# Altium PCB I2C_PCB.PcbDoc
Units mm, origin at the board's own origin, x right, y up, seen from the top; angles counter-clockwise.
Board outline 28.96 x 15.49 mm, 2 copper layers (Top Layer, Bottom Layer); 12 components, 8 nets, 32 pads, 4 vias.
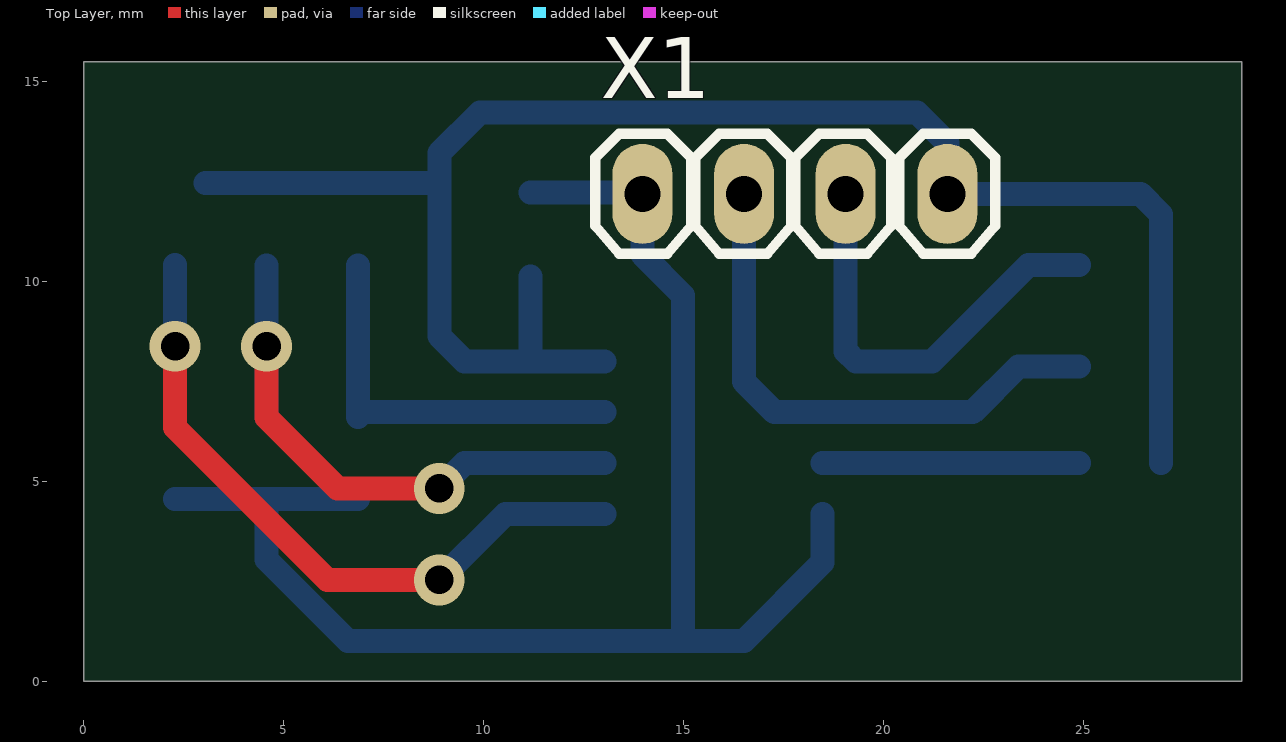
[diagram p0: Top Layer view]
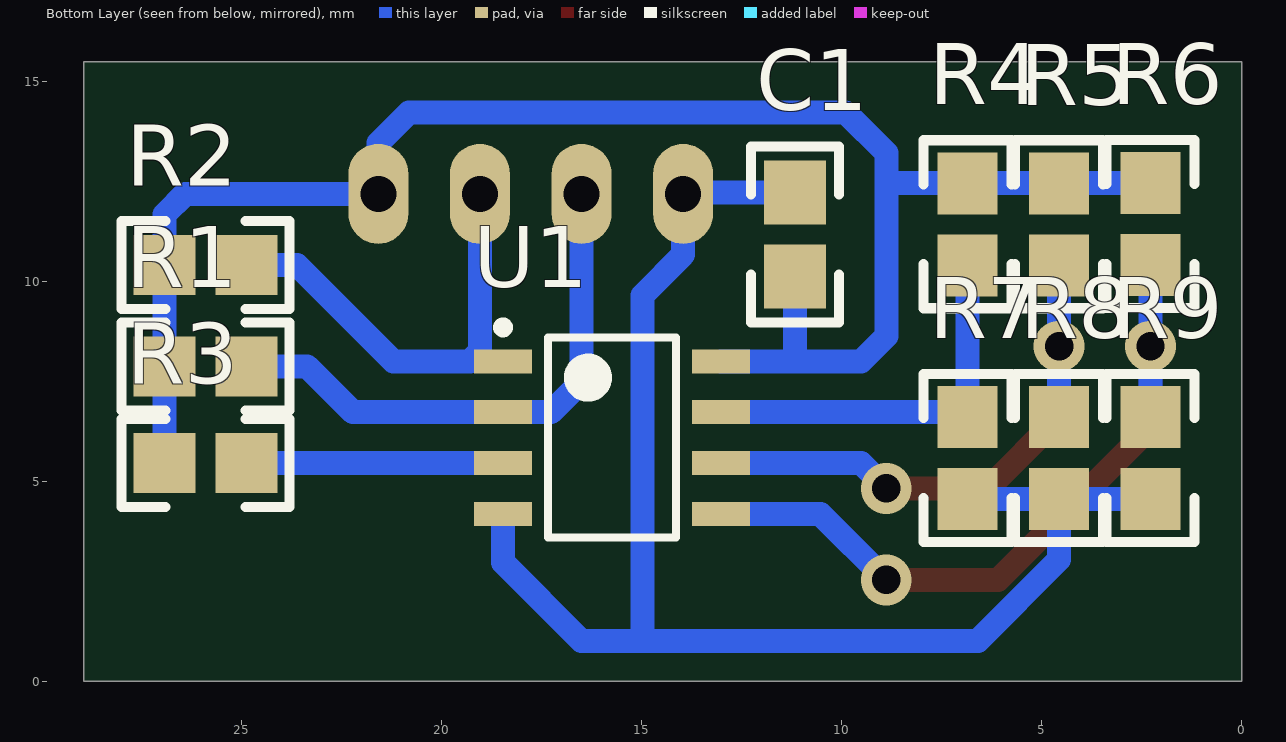
[diagram p1: Bottom Layer view, seen from below]
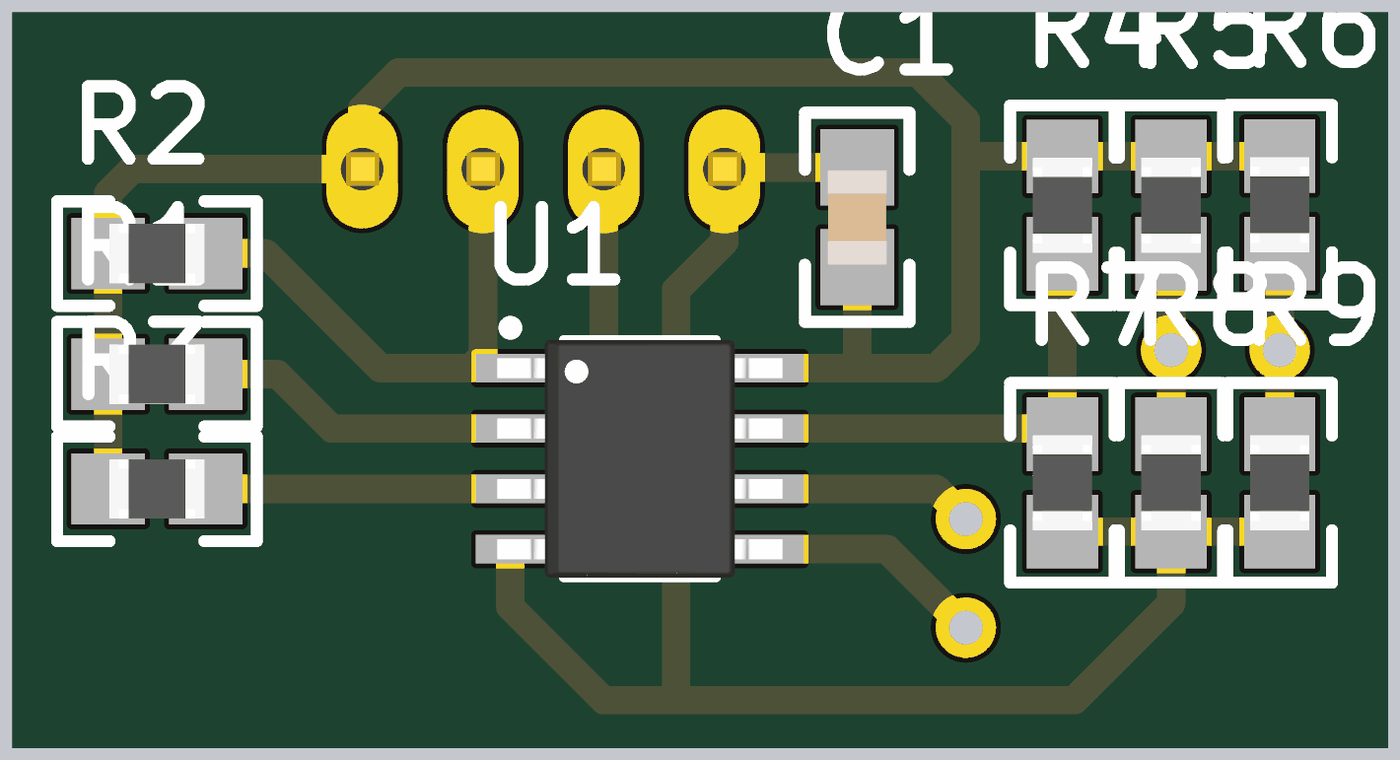
[diagram p2: 3D render of the assembled board from below, using the file's embedded part models]

## Layer stack, top to bottom
Top Solder: solder mask 0.0102, Solder Resist, Dk 3.5
Top Layer: signal copper 0.0356
Dielectric 1: dielectric 0.32, FR-4, Dk 4.8
Bottom Layer: signal copper 0.0356
Bottom Solder: solder mask 0.0102, Solder Resist, Dk 3.5

## Board outline
0,0 28.956,0 28.956,15.494 0,15.494

## Design rules (kind name [scope] priority, off if disabled: settings)
Clearance [All] p1: gap=0.254 ignorepadtopadclearanceinfootprint=FALSE except(0: Arc-Hole Track-Hole SMDPad-Hole THPad-Hole Via-Hole Fill-Hole Poly-Hole Region-Hole Text-Hole)
PolygonConnect [All] p1: connectstyle=Relief reliefconductorwidth=0.254 reliefentries=4 polygonreliefangle="90 Angle" airgapwidth=0.254
RoomDefinition I2C_Sheet [InComponentClass('I2C_Sheet')] p1: confinementstyle=ConfineIn formatcopy=TRUE lockcomponents=FALSE outline -0.499,-0.762 143.51,-0.762 143.51,79.248 -0.499,79.248
RoutingVias [All] p1: holewidth=0.711 width=1.27 viastyle="Through Hole" minholewidth=0.711 minwidth=1.27 maxholewidth=0.711 maxwidth=1.27
SolderMaskExpansion [All] p1: expansion=0.102
Width [All] p1: maxlimit=5 minlimit=0.2 preferedwidth=0.5
30 further rules are at their usual default settings.

## Components (designator, comment, footprint, x,y, rotation, side; value= is the part's Value field where it differs from the comment)
C1 "100n" CC0805_3D 11.176,11.176 r270 bottom
R1 "4.7k" RC0805_3D 25.908,7.874 r0 bottom
R2 "4.7k" RC0805_3D 25.908,10.414 r0 bottom
R3 "10k" RC0805_3D 25.908,5.461 r0 bottom
R4 "10k" RC0805_3D 6.858,11.43 r90 bottom
R5 "10k" RC0805_3D 4.572,11.43 r90 bottom
R6 "10k" RC0805_3D 2.286,11.439 r90 bottom
R7 "10k" RC0805_3D 6.858,5.588 r90 bottom
R8 "10k" RC0805_3D 4.572,5.588 r90 bottom
R9 "10k" RC0805_3D 2.286,5.588 r90 bottom
U1 "LM75A" SOIC-8 15.748,6.096 r180 bottom
X1 "PLS4" PLS4 21.59,12.192 r180 top

## Footprints (in the part's own frame and the unit in brackets; to place one, negate y for a bottom-side part, rotate by r counter-clockwise, add the part's x,y. Pads: shape width x height; smd on the part's side, far side on the other; paste and mask are expansions set on the pad)
CC0805_3D [mm] "Chip Capacitor, 2-Leads, Body 2,80x1,40mm, IPC Medium Density"
  rect 1.6x1.55 smd: 1(-1.05,0) 2(1.05,0)
  silkscreen extent -2.2,-1.1 2.2,1.1, body extent -1,-0.62 1,0.63, height 0.6
PLS4 [mm]
  oval 1.5x2.5 hole 0.9: 1(0,0) 2(2.54,0) 3(5.08,0) 4(7.62,0)
  silkscreen extent -1.2,-1.5 8.8,1.5, body extent -1.26,-1.27 8.9,1.27, height 8.44
RC0805_3D [mm]
  rect 1.55x1.5 smd: 1(-1.025,0) 2(1.025,0)
  silkscreen extent -2.1,-1.1 2.1,1.1, body extent -1,-0.63 1,0.63, height 0.44
SOIC-8 [mm]
  rect 1.45x0.6 smd: 1(-2.725,1.905) 2(-2.725,0.635) 3(-2.725,-0.635) 4(-2.725,-1.905) 5(2.725,-1.905) 6(2.725,-0.635) 7(2.725,0.635) 8(2.725,1.905)
  silkscreen extent -2.85,-2.5 1.6,2.88, body extent -3,-2.5 3,2.5, height 1.75

## Part data
C1: library part "CC0805 X uF"
R1 R2 R3 R4 R5 R6 R7 R8 R9: library part "RC0805 X Ohm"

## Via types
v1: diameter 1.27, hole 0.711, Top Layer to Bottom Layer, 4 vias

## Nets (pads, with @x,y where several pads share a name; then routed paths per layer and width w, separated by ;. In a path a pad name is that pad's centre, name@x,y a point inside that pad or via, vN(x,y) a via of type N, cw(c..) or ccw(c..) an arc to the next point about the centre after c; other vN are vias at no path point)
3.3V: C1.2 R1.2 R2.2 R3.2 R4.2 R5.2 R6.2 U1.8 X1.1 | length 43.4
  Bottom Layer w0.6: 3.048,12.464 6.858,12.464 8.89,12.464 ; C1.2 11.176,8.001 ; U1.8 11.176,8.001 ; R3.2 R1.2 R2.2 26.933,11.675 26.416,12.192 X1.1 21.59,13.462 20.828,14.224 9.906,14.224 8.89,13.208 8.89,12.464 ; 8.89,12.464 8.89,8.636 9.525,8.001 11.176,8.001
GND: C1.1 R7.1 R8.1 R9.1 U1.4 X1.4 | length 37.3
  Bottom Layer w0.6: R9.1 R8.1 ; R7.1 R8.1 ; C1.1 13.936,12.226 X1.4 13.97,10.668 14.986,9.652 14.986,1.016 ; U1.4 18.473,2.979 16.51,1.016 14.986,1.016 ; R8.1 4.572,3.048 6.604,1.016 14.986,1.016
NetR1_1: R1.1 U1.2 X1.3 | length 13.9
  Bottom Layer w0.6: X1.3 16.51,7.493 17.272,6.731 U1.2 22.225,6.731 23.368,7.874 R1.1
NetR2_1: R2.1 U1.1 X1.2 | length 10.9
  Bottom Layer w0.6: X1.2 19.05,8.255 19.304,8.001 21.209,8.001 23.622,10.414 R2.1
NetR3_1: R3.1 U1.3 | length 6.4
  Bottom Layer w0.6: U1.3 R3.1
NetR4_1: R4.1 R7.2 U1.7 | length 10
  Bottom Layer w0.6: R4.1 R7.2 6.976,6.731 U1.7
NetR5_1: R5.1 R8.2 U1.6 | length 15
  Top Layer w0.6: v1(4.572,8.382) 4.572,6.604 6.35,4.826 v1(8.89,4.826)
  Bottom Layer w0.6: R8.2 v1(4.572,8.382) R5.1 ; v1(8.89,4.826) 9.525,5.461 U1.6
NetR6_1: R6.1 R9.2 U1.5 | length 18.8
  Top Layer w0.6: v1(2.286,8.382) 2.286,6.35 6.096,2.54 v1(8.89,2.54)
  Bottom Layer w0.6: R9.2 v1(2.286,8.382) R6.1 ; v1(8.89,2.54) 10.541,4.191 U1.5

## Silkscreen, mask and mechanical layers (free items; w line width, h text height)
Mechanical 2:
  the board outline again, w0.2